# EAGLE board shield_stmotor (EAGLE 7.3.0)
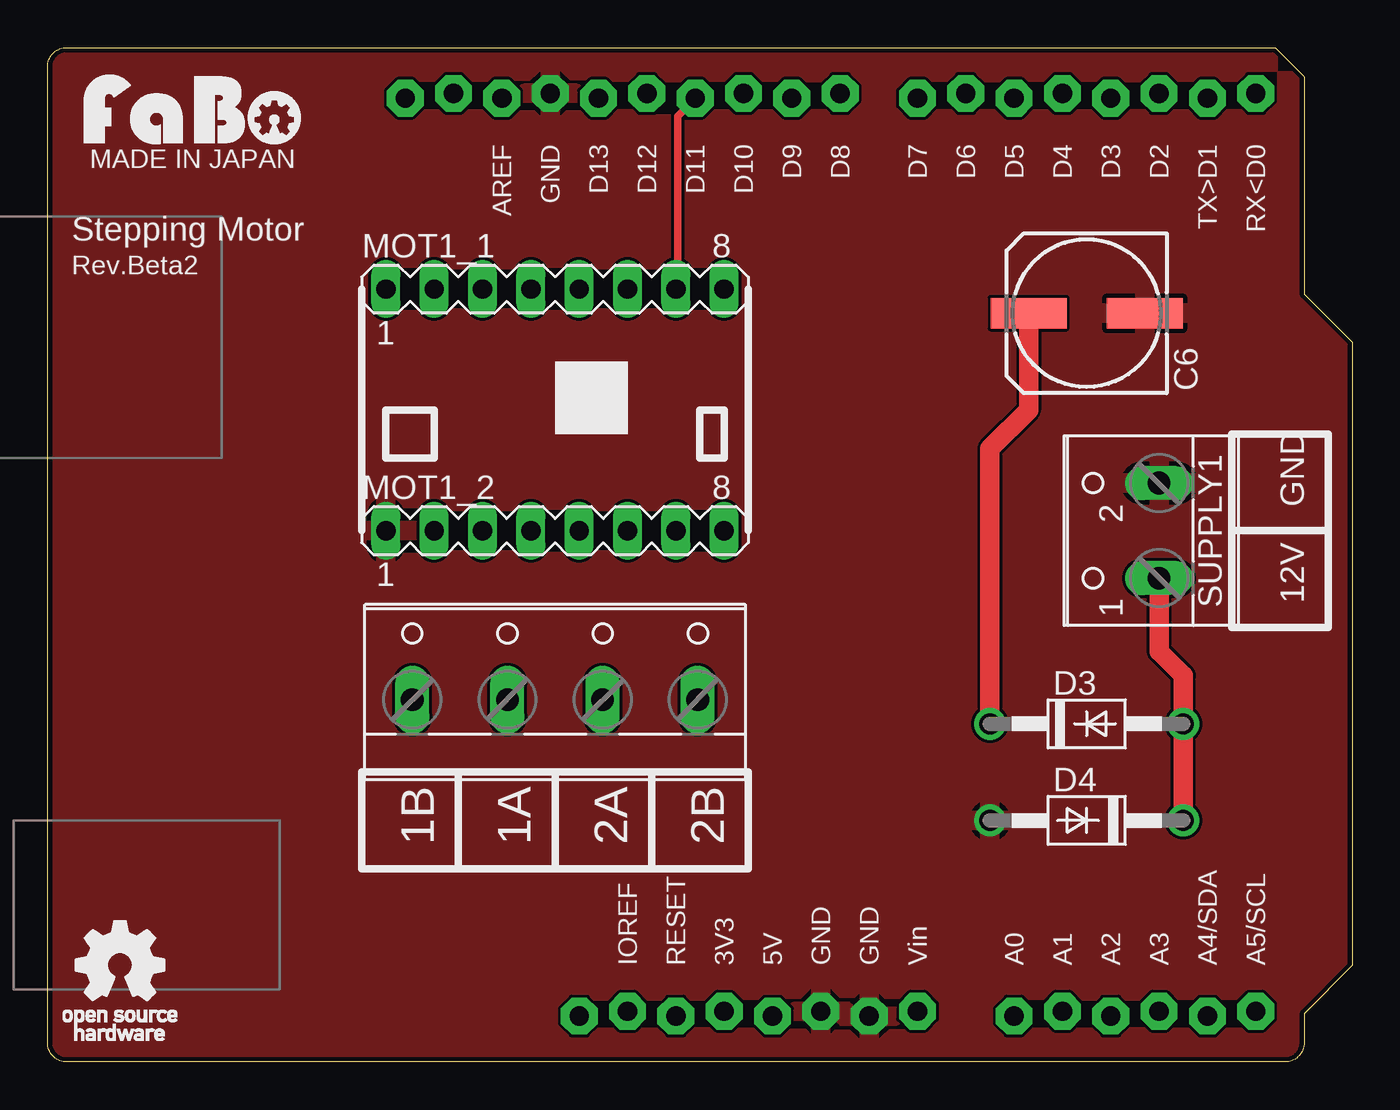
[diagram p0: board, top side]
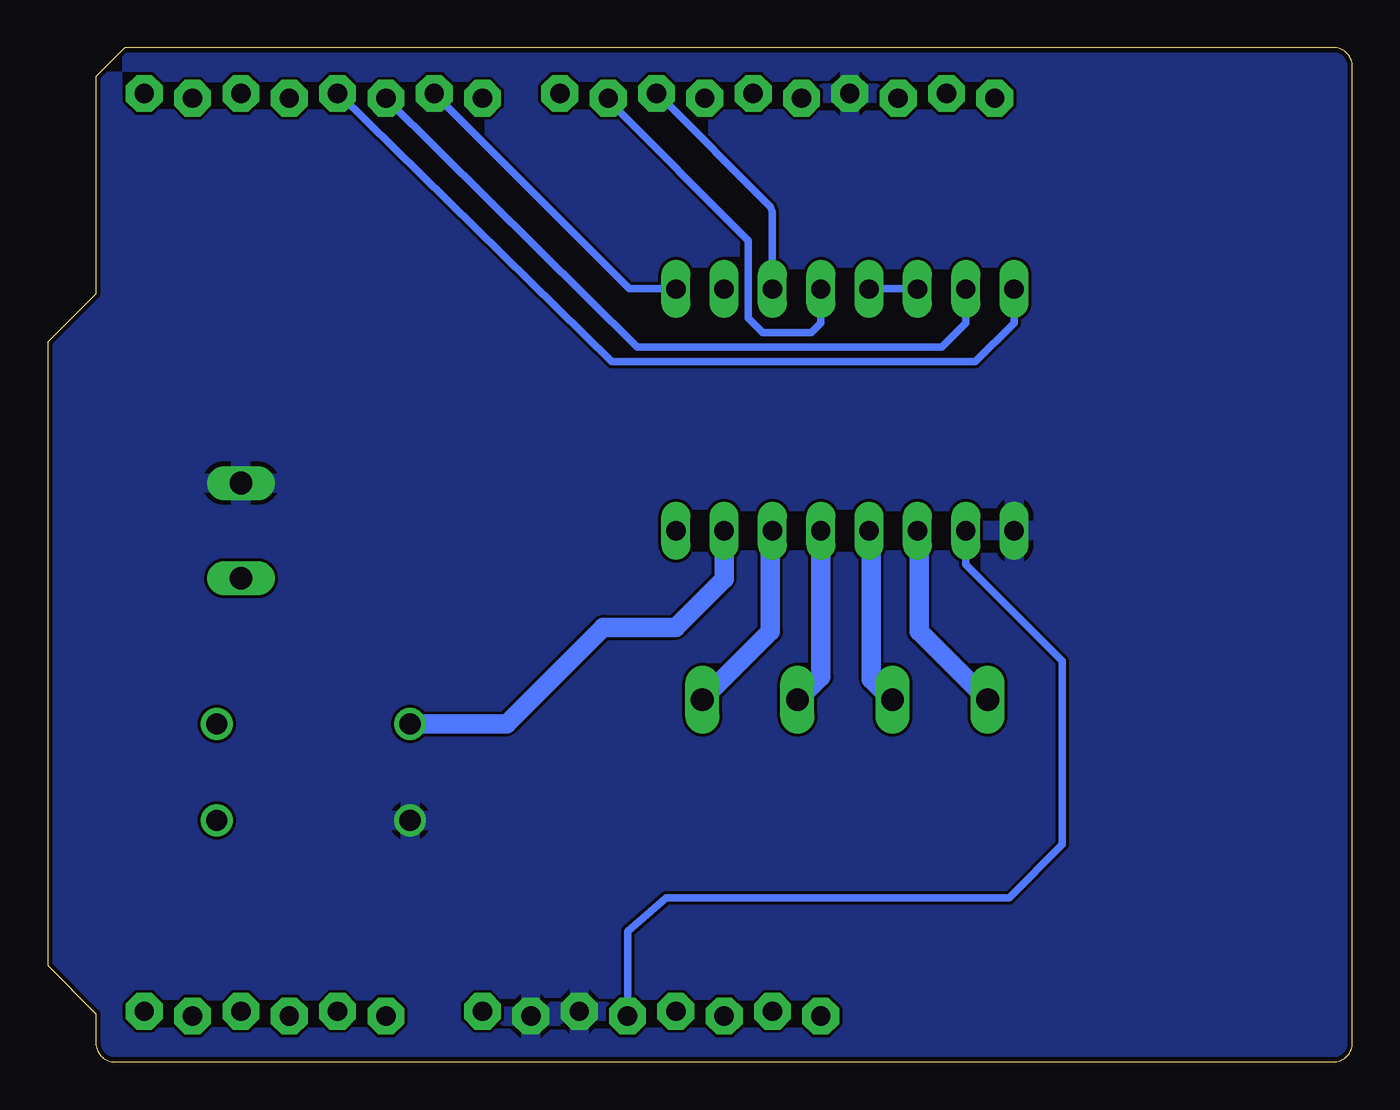
[diagram p1: board, bottom side, seen from below]

Size 68.58 x 53.34 mm. Coordinates in mm from the lower left corner, seen from the top.
Copper layers (1*16): Top 0.035mm / dielectric 1.5mm / Bottom 0.035mm
Design rules "Elecrow_2-layer_eagle_rule": minimum track width 6mil, minimum drill 12mil, track to track 6mil, track to pad 6mil, pad to pad 6mil, via to via 6mil, smd to smd 0mil, copper to edge 10mil, drill to drill 10mil, minimum pad ring 10mil, minimum via ring 6mil, stop-mask expansion 2mil, vias tented up to drill 100mil, thermal gap 10mil
Net classes: 0 default: width 0.406 mm; 1 +12V: width 1.016 mm

## Footprints (pad centres in the part's own frame; a part is rotated, then mirrored left to right if it is on the bottom)
W237-4 = drill 1.194 long: 1 -7.5,-1.27; 2 -2.5,-1.27; 3 2.5,-1.27; 4 7.5,-1.27
153CLV-0807 = smd 4 x 1.6: + 3.05,0; - -3.05,0
DO41-10 = drill 1.118: A 5.08,0; C -5.08,0
MA08-1 = drill 1.016 long: 1 -8.89,0; 2 -6.35,0; 3 -3.81,0; 4 -1.27,0; 5 1.27,0; 6 3.81,0; 7 6.35,0; 8 8.89,0
W237-102 = drill 1.194 long: 1 -2.5,-1.27; 2 2.5,-1.27
ARDUINO_UNO_R3 = drill 1.016 pad 1.93 octagon: 3V3 35.56,2.667; 5V 38.1,2.413; A0 50.8,2.413; A1 53.34,2.667; A2 55.88,2.413; A3 58.42,2.667; A4 60.96,2.413; A5 63.5,2.667; AREF 23.876,50.673; D0 63.5,50.927; D1 60.96,50.673; D2 58.42,50.927; D3 55.88,50.673; D4 53.34,50.927; D5 50.8,50.673; D6 48.26,50.927; D7 45.72,50.673; D8 41.656,50.927; D9 39.116,50.673; D10 36.576,50.927; D11 34.036,50.673; D12 31.496,50.927; D13 28.956,50.673; GND1 43.18,2.413; GND2 40.64,2.667; GND3 26.416,50.927; IOREF 30.48,2.667; RESERVED 27.94,2.413; RESET 33.02,2.413; SCL 18.796,50.673; SDA 21.336,50.927; VIN 45.72,2.667

## Placement (x,y rotation side)
.  [W237-4]  26.67,20.32 0 top
C6  [153CLV-0807]  54.61,39.37 180 top
D3  1N4001  [DO41-10]  54.61,17.78 0 top
D4  1N4001  [DO41-10]  54.61,12.7 180 top
MOT1_1  [MA08-1]  26.67,40.64 0 top
MOT1_2  [MA08-1]  26.67,27.94 0 top
SUPPLY1  [W237-102]  57.15,27.94 90 top
U1  [ARDUINO_UNO_R3]  0,0 0 top
U$1  [LOGO_FABO_M]  7.62,48.26 0 top
U$2  [LOGO_OSHW_T_M]  3.81,5.08 0 top

## Library data of the parts
. = con-wago-500; OC_FARNELL: unknown; OC_NEWARK: unknown
C6 = rcl
D3 D4 = diode
MOT1_1 MOT1_2 = con-lstb; OC_FARNELL: unknown; OC_NEWARK: unknown
SUPPLY1 = con-wago-500; MPN: 237-102; OC_FARNELL: unknown; OC_NEWARK: 70K9898
U1 U$2 = GClue
U$1 = FaBo

## Nets
3V3: U1.3V3
+5V: MOT1_2.2 U1.5V
+12V [+12V]: C6.+ D3.C MOT1_2.7
GND: C6.- D4.A MOT1_2.1 SUPPLY1.2 U1.GND1 U1.GND2 U1.GND3
MOT1_MS1: MOT1_1.7 U1.D11
MOT1_MS2: MOT1_1.6 U1.D10
MOT1_MS3: MOT1_1.5 U1.D9
N$1 [+12V]: D3.A D4.C SUPPLY1.1
N$2: MOT1_2.8
S1_1A [+12V]: ..2 MOT1_2.4
S1_1B [+12V]: ..1 MOT1_2.3
S1_2A [+12V]: ..3 MOT1_2.5
S1_2B [+12V]: ..4 MOT1_2.6
S1_DIR: MOT1_1.1 U1.D4
S1_EN: MOT1_1.8 U1.D6
S1_RST: MOT1_1.3 MOT1_1.4
S1_STEP: MOT1_1.2 U1.D5
VIN: U1.VIN

## Tracks (layer width: path | path; a pad name or v marks a point on that pad's centre or on a via)
+5V
  Bottom 0.406: U1.5V 38.1,6.86 36.07,8.64 18.03,8.64 15.24,11.43 15.24,21.08 20.32,26.16 MOT1_2.2
+12V
  Top 1.016: C6.+ 51.56,34.29 49.53,32.26 D3.C
  Bottom 1.016: D3.C 44.45,17.78 39.37,22.86 35.56,22.86 33.02,25.4 MOT1_2.7
GND
  pour Bottom: -1.27,54.61 69.85,54.61 69.85,-1.27 -1.27,-1.27
  pour Top: -1.27,54.61 69.85,54.61 69.85,-1.27 -1.27,-1.27
MOT1_MS1
  Top 0.406: MOT1_1.7 33.11,40.65 33.11,49.73 33.95,50.57 U1.D11
MOT1_MS2
  Bottom 0.406: MOT1_1.6 30.48,44.7 30.59,44.98 36.46,50.85 U1.D10
MOT1_MS3
  Bottom 0.406: MOT1_1.5 27.94,38.86 28.45,38.35 30.99,38.35 31.75,39.12 31.75,43.18 39.12,50.57 U1.D9
N$1
  Top 1.016: D4.C D3.A 59.69,20.32 58.42,21.59 SUPPLY1.1
S1_1A
  Bottom 1.016: MOT1_2.4 25.29,27.94 25.29,20.12 24.31,19.14 ..2
S1_1B
  Bottom 1.016: MOT1_2.3 22.77,27.94 22.77,22.63 19.28,19.14 ..1
S1_2A
  Bottom 1.016: MOT1_2.5 27.94,20.26 29.06,19.14 ..3
S1_2B
  Bottom 1.016: MOT1_2.6 30.59,27.94 30.59,22.63 34.09,19.14 ..4
S1_DIR
  Bottom 0.406: MOT1_1.1 17.78,38.86 19.81,36.83 38.94,36.82 53.23,50.85 U1.D4
S1_EN
  Bottom 0.406: MOT1_1.8 35.62,40.65 38,40.65 48.2,50.85 U1.D6
S1_RST
  Bottom 0.406: MOT1_1.3 22.91,40.65 25.29,40.65 MOT1_1.4
S1_STEP
  Bottom 0.406: MOT1_1.2 20.32,38.86 21.59,37.59 37.59,37.59 50.71,50.57 U1.D5

## Text on the board
tPlace: MADE IN JAPAN | Stepping Motor | Rev.Beta2 | GND | 12V | 1B | 1A | 2A | 2B